# Altium PCB jlink-adapter.PcbDoc
Units mm, origin at the board's own origin, x right, y up, seen from the top; angles counter-clockwise.
Board outline 28.07 x 34.29 mm, 2 copper layers (Top Layer, Bottom Layer); 5 components, 9 nets, 38 pads, 0 vias.
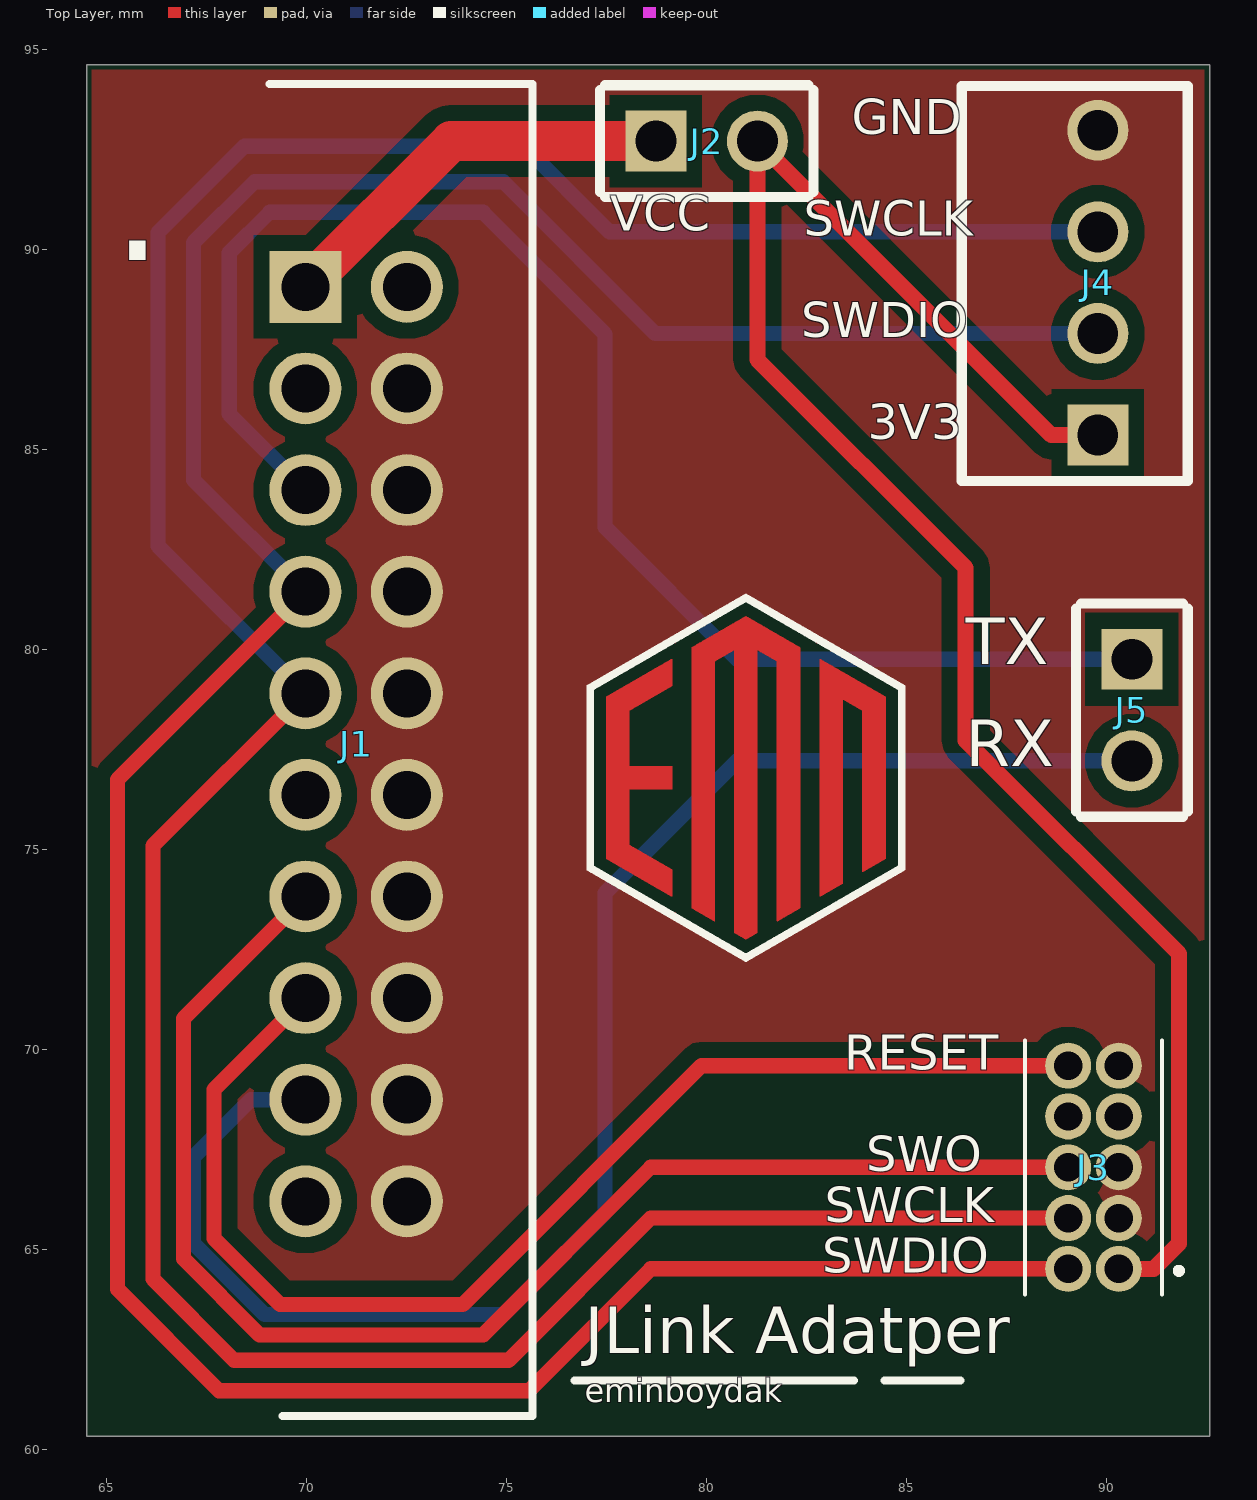
[diagram p0: Top Layer view]
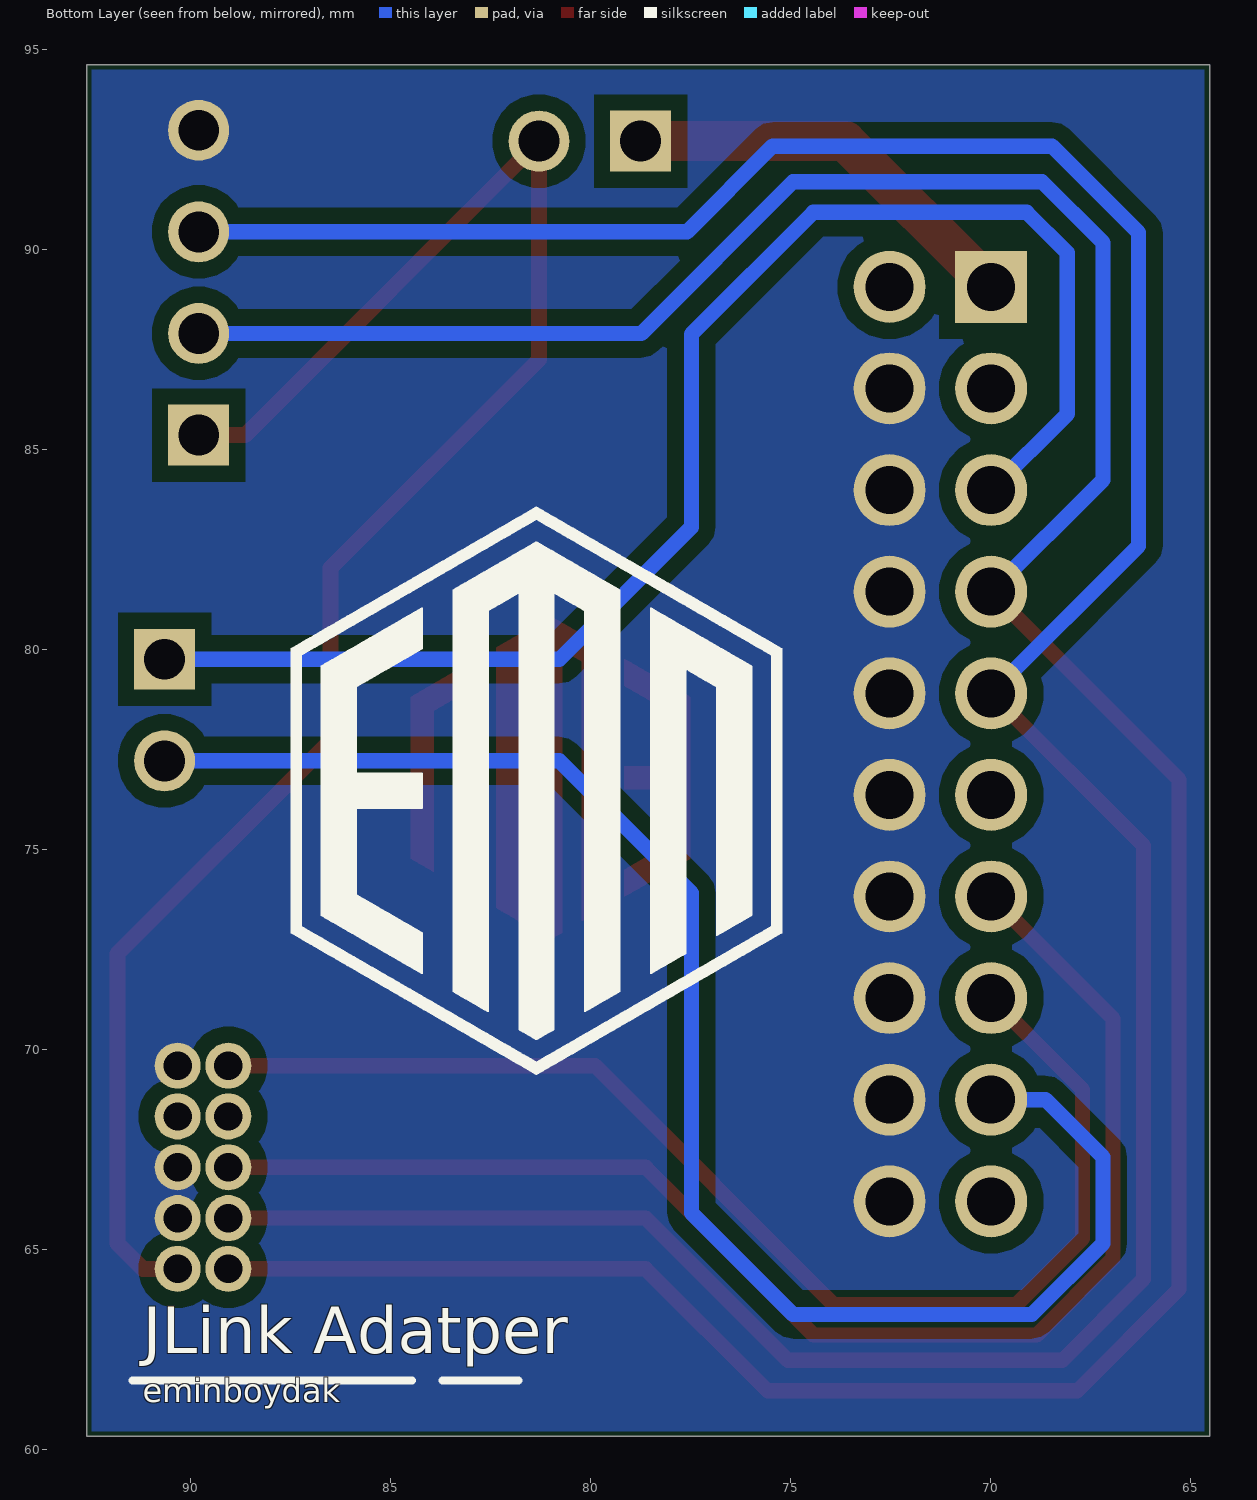
[diagram p1: Bottom Layer view, seen from below]
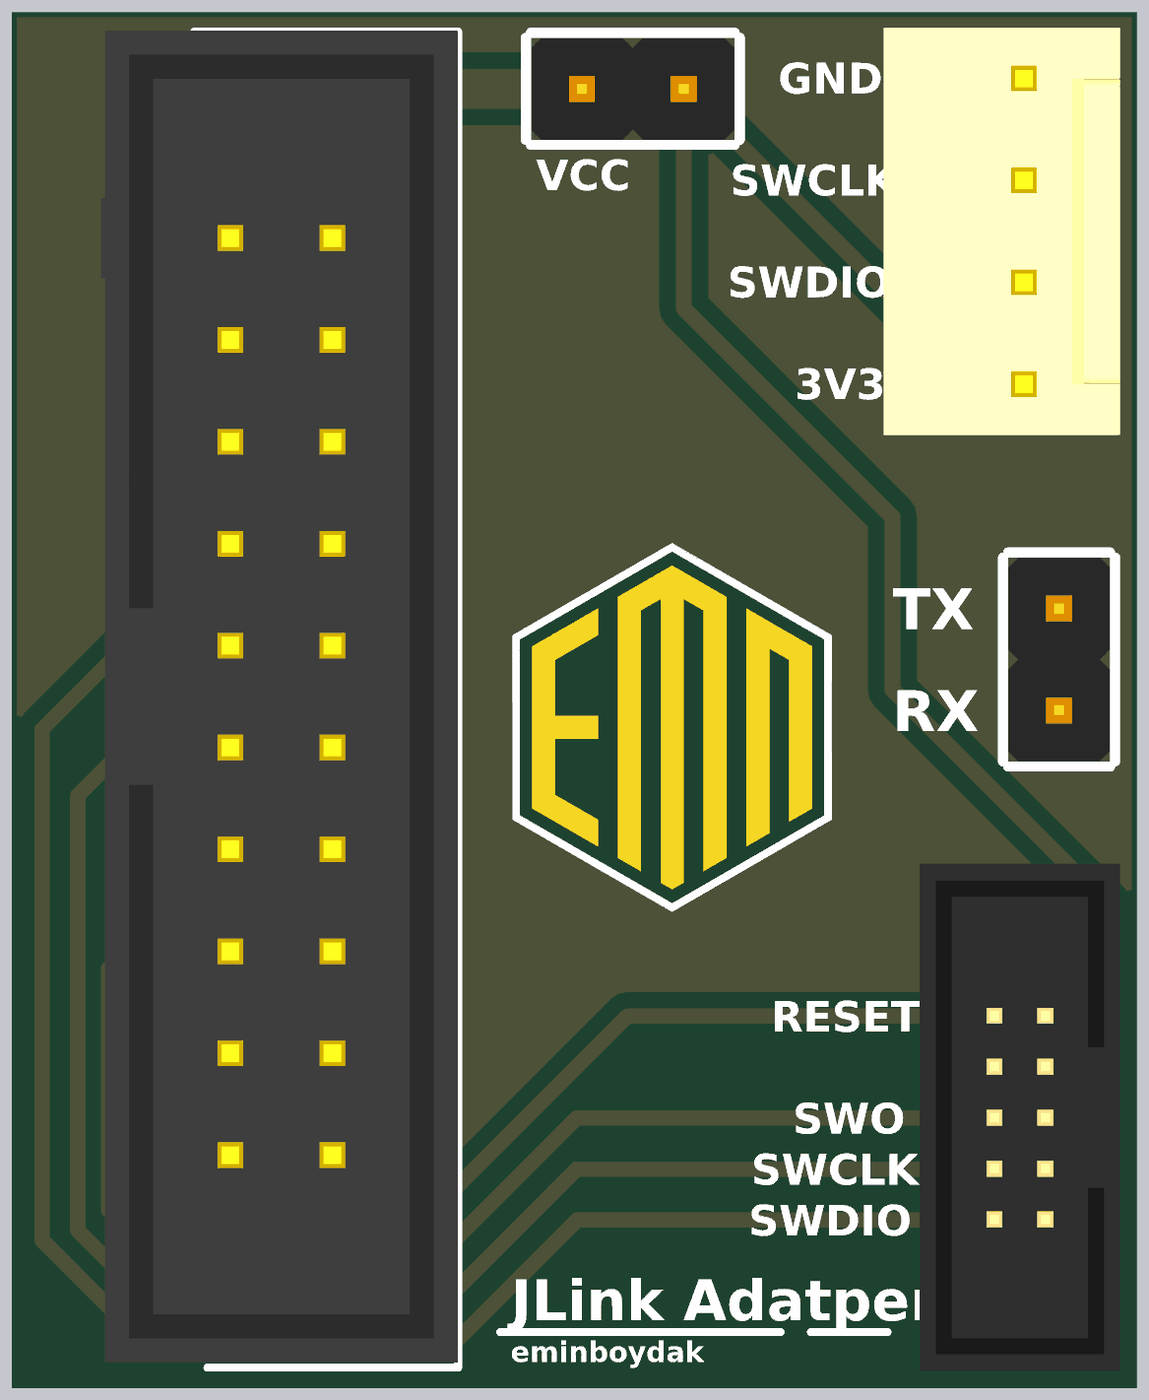
[diagram p2: 3D render of the assembled board from above, using the file's embedded part models]

## Layer stack, top to bottom
Top Solder: solder mask 0.0102, Solder Resist, Dk 3.5
Top Layer: signal copper 0.0356
Dielectric 1: dielectric 0.32, FR-4, Dk 4.8
Bottom Layer: signal copper 0.0356
Bottom Solder: solder mask 0.0102, Solder Resist, Dk 3.5

## Board outline
64.516,60.325 64.516,94.615 92.583,94.615 92.583,60.325

## Design rules (kind name [scope] priority, off if disabled: settings)
Clearance Clearance_10 [InNamedPolygon('GND_L02_P000')] p1: gap=0.4 ignorepadtopadclearanceinfootprint=FALSE
Clearance Clearance_9 [InNamedPolygon('GND_L01_P001')] p2: gap=0.4 ignorepadtopadclearanceinfootprint=FALSE
Clearance Clearance_8 [InNamedPolygon('GND_L02_P001') vs InNet('+12V')] p3: gap=0.5 ignorepadtopadclearanceinfootprint=FALSE
Clearance Clearance_7 [InNamedPolygon('GND_L01_P002') vs InNet('+12V')] p4: gap=0.5 ignorepadtopadclearanceinfootprint=FALSE
Clearance Clearance_6 [InNamedPolygon('GND_L02_P001') vs InNet('+3V3')] p5: gap=0.5 ignorepadtopadclearanceinfootprint=FALSE
Clearance Clearance_5 [InNamedPolygon('GND_L01_P002') vs InNet('+3V3')] p6: gap=0.254 ignorepadtopadclearanceinfootprint=FALSE
Clearance Clearance_4 [InNamedPolygon('GND_L02_P001') vs InNet('+5V')] p7: gap=0.5 ignorepadtopadclearanceinfootprint=FALSE
Clearance Clearance_3 [InNamedPolygon('GND_L01_P002') vs InNet('+5V')] p8: gap=0.5 ignorepadtopadclearanceinfootprint=FALSE
Clearance Clearance_2 [InNamedPolygon('GND_L02_P001')] p9: gap=0.254 ignorepadtopadclearanceinfootprint=FALSE
Clearance Clearance_1 [InNamedPolygon('GND_L01_P002')] p10: gap=0.254 ignorepadtopadclearanceinfootprint=FALSE
Clearance [All] p11: gap=0.2 ignorepadtopadclearanceinfootprint=TRUE
ComponentClearance [All] p1: gap=0 collisioncheckmode=3 verticalgap=0 showdistances=FALSE
HoleSize [All] p1: absolutevalues=TRUE maxlimit=6.3 minlimit=0.2 maxpercent=80.000 minpercent=20.000
MinimumSolderMaskSliver [All] p1: minsoldermaskwidth=0.2
NetAntennae [All] p1: netantennaetolerance=4
PlaneConnect [All] p1: planeconnectstyle=Direct reliefexpansion=0.508 reliefentries=4 reliefconductorwidth=0.254 reliefairgap=0.254
PolygonConnect [All] p1: connectstyle=Direct reliefconductorwidth=0.254 reliefentries=4 polygonreliefangle="90 Angle" airgapwidth=0.254
RoutingVias [All] p1: holewidth=0.3 width=0.5 viastyle="Through Hole" minholewidth=0.2 minwidth=0.4 maxholewidth=6.3 maxwidth=12.6
SilkToSilkClearance [All] p1: silktosilkclearance=0
SilkToSolderMaskClearance [IsPad] p1: minsilkscreentomaskgap=0 clearancetoexposedcopper=TRUE
SolderMaskExpansion [All] p1: expansion=0.1 istentingtop=FALSE
Width [All] p1: maxlimit=4 minlimit=0.127 preferedwidth=0.254
23 further rules are at their usual default settings.

## Components (designator, comment, footprint, x,y, rotation, side; value= is the part's Value field where it differs from the comment)
J1 "" CONN_BOX_2x10_2.54_90_THT 69.977,89.066 r270 top
J2 "VCC Select" CONN_1x2_2.54_THT 78.74,92.71 r0 top
J3 "10-Pin SWD" CONN_BOX_2x5_1.27_90_THT 90.316,64.516 r90 top
J4 "4-Pin SWD" WF_4 89.789,85.361 r90 top
J5 "UART" CONN_1x2_2.54_THT 90.642,79.756 r270 top

## Footprints (in the part's own frame and the unit in brackets; to place one, negate y for a bottom-side part, rotate by r counter-clockwise, add the part's x,y. Pads: shape width x height; smd on the part's side, far side on the other; paste and mask are expansions set on the pad)
CONN_1x2_2.54_THT [mil]
  rect 60x60 hole 40.16: 1(0,0)
  round 60 hole 40.16: 2(100,0)
  silkscreen extent -55,-55 155,55, body extent -50,-50 150,50, height 350
CONN_BOX_2x5_1.27_90_THT [mm]
  round 1.15 hole 0.71: 1(0,0) 2(0,1.27) 3(1.27,0) 4(1.27,1.27) 5(2.54,0) 6(2.54,1.27) 7(3.81,0) 8(3.81,1.27) 9(5.08,0) 10(5.08,1.27)
  silkscreen extent -0.64,-1.55 5.71,2.35, body extent -3.78,-1.85 8.88,3.15, height 5
CONN_BOX_2x10_2.54_90_THT [mm]
  rect 1.8x1.8 hole 1.2: 1(0,0)
  round 1.8 hole 1.2: 2(0,2.54) 3(2.54,0) 4(2.54,2.54) 5(5.08,0) 6(5.08,2.54) 7(7.62,0) 8(7.62,2.54) 9(10.16,0) 10(10.16,2.54) 11(12.7,0) 12(12.7,2.54) 13(15.24,0) 14(15.24,2.54) 15(17.78,0) 16(17.78,2.54) 17(20.32,0) 18(20.32,2.54) 19(22.86,0) 20(22.86,2.54)
  silkscreen extent -5.07,-0.9 28.23,5.68, body extent -5.1,-3.23 28.1,5.67, height 9
WF_4 [mil]
  rect 60x60 hole 40.16: 1(0,0)
  round 60 hole 40.16: 2(100,0) 3(200,0) 4(300,0)
  silkscreen extent -45,-89 344,134, body extent -51,-94 349,139, height 449

## Part data
J1: library part "CONN 2x10", "Connector"
J2 J5: library part "CONN 1x2", "Connector"
J3: library part "CONN 2x5", "Connector", ComponentLink1Description="Özdisan Link", ComponentLink1URL=https://ozdisan.com/konnektor-ve-baglanti-elemanlari/header-konnektorler/box-headerlar/L-KLS1-202C-10-S-B, Özdisan Kodu=L-KLS1-202C-10-S-B
J4: library part "CONN 1x4", "Connector"

## Nets (pads, with @x,y where several pads share a name; then routed paths per layer and width w, separated by ;. In a path a pad name is that pad's centre, name@x,y a point inside that pad or via, vN(x,y) a via of type N, cw(c..) or ccw(c..) an arc to the next point about the centre after c; other vN are vias at no path point)
3V3-I: J1.1 J2.1 | length 10.3
  Top Layer w1: J1.1 73.621,92.71 J2.1
3V3-O: J2.2 J3.1 J4.1 | length 45.2
  Top Layer w0.4: J4.1 88.629,85.361 J2.2 81.28,87.249 86.487,82.042 86.487,77.724 91.821,72.39 91.821,65.151 91.186,64.516 J3.1
GND: J1.4 J1.6 J1.8 J1.10 J1.12 J1.14 J1.16 J1.18 J1.20 J3.3 J3.5 J3.9 J4.4
RESET: J1.15 J3.10 | length 31.5
  Top Layer w0.381: J1.15 67.691,69 67.691,65.278 69.342,63.627 73.914,63.627 79.883,69.596 J3.10
RXD: J1.17 J5.2 | length 40.2
  Bottom Layer w0.381: J1.17 68.619,68.746 67.183,67.31 67.183,65.151 68.961,63.373 74.93,63.373 77.47,65.913 77.47,73.914 80.772,77.216 J5.2
SWCLK: J1.9 J3.4 J4.3 | length 79.7
  Top Layer w0.381: J1.9 66.167,75.096 66.167,64.262 68.199,62.23 75.057,62.23 78.613,65.786 J3.4
  Bottom Layer w0.381: J1.9 66.294,82.589 66.294,90.424 68.453,92.583 75.438,92.583 77.58,90.441 J4.3
SWDIO: J1.7 J3.2 J4.2 | length 80.5
  Top Layer w0.381: J1.7 65.278,76.747 65.278,64.008 67.818,61.468 75.565,61.468 78.613,64.516 J3.2@89.027,64.516
  Bottom Layer w0.381: J1.7@69.742,81.211 J1.7 67.183,84.24 67.183,90.17 68.707,91.694 74.93,91.694 78.723,87.901 J4.2
SWO: J1.13 J3.6 | length 35
  Top Layer w0.381: J1.13 66.929,70.778 66.929,64.77 68.834,62.865 74.422,62.865 78.613,67.056 J3.6
TXD: J1.5 J5.1 | length 37.2
  Bottom Layer w0.381: J1.5 68.072,85.891 68.072,89.916 69.088,90.932 74.422,90.932 77.47,87.884 77.47,83.058 80.772,79.756 J5.1
pads on no net: J1.2 J1.3 J1.11 J1.19 J3.7 J3.8

## Polygon pours and split planes (outlines as drawn)
GND on Bottom Layer "GND_L02_P000" (solid, remove dead copper, pour order 0): 64.643,94.488 92.456,94.488 92.456,60.452 64.643,60.452
GND on Top Layer "GND_L01_P001" (solid, remove dead copper, pour order 1): 64.643,94.488 92.456,94.488 92.456,60.452 64.643,60.452

## Other copper
Top Layer:
  region: 963 vertices and 0 holes, not listed, extent 82.836,73.827 84.488,79.759
  region: 1599 vertices and 0 holes, not listed, extent 79.633,72.757 82.349,80.828
  region: 1611 vertices and 0 holes, not listed, extent 77.494,73.827 79.146,79.759

## Silkscreen, mask and mechanical layers (free items; w line width, h text height)
Top Overlay:
  drawing of 3 lines, arcs and shapes, not listed
  text "GND" at 83.633,92.593 h1.5
  text "VCC" at 77.596,90.182 h1.5
  text "SWCLK" at 82.436,90.053 h1.5
  text "." at 65.151,88.784 h5
  text "SWDIO" at 82.371,87.513 h1.5
  text "3V3" at 84.042,84.973 h1.5
  text "TX" at 86.487,79.238 h2
  text "RX" at 86.487,76.698 h2
  text "RESET" at 83.452,69.208 h1.5
  text "SWO" at 83.999,66.668 h1.5
  text "SWCLK" at 82.963,65.398 h1.5
  text "SWDIO" at 82.898,64.128 h1.5
  text "JLink Adatper" at 76.962,62.013 h2
  text "eminboydak" at 76.962,60.978 h1
Bottom Overlay:
  drawing of 6 lines, arcs and shapes, not listed
  text "JLink Adatper" at 91.186,62.013 h2
  text "eminboydak" at 91.186,60.978 h1
Top Solder:
  drawing of 3 lines, arcs and shapes, not listed
Board:
  the board outline again, w0.254